# Altium PCB PCB1.PcbDoc
Units mm, origin at the board's own origin, x right, y up, seen from the top; angles counter-clockwise.
Board outline 152.4 x 101.6 mm, 2 copper layers (Top Layer, Bottom Layer); 71 components, 48 nets, 226 pads, 97 vias.
Unrouted connection lines stored in the file: 1.
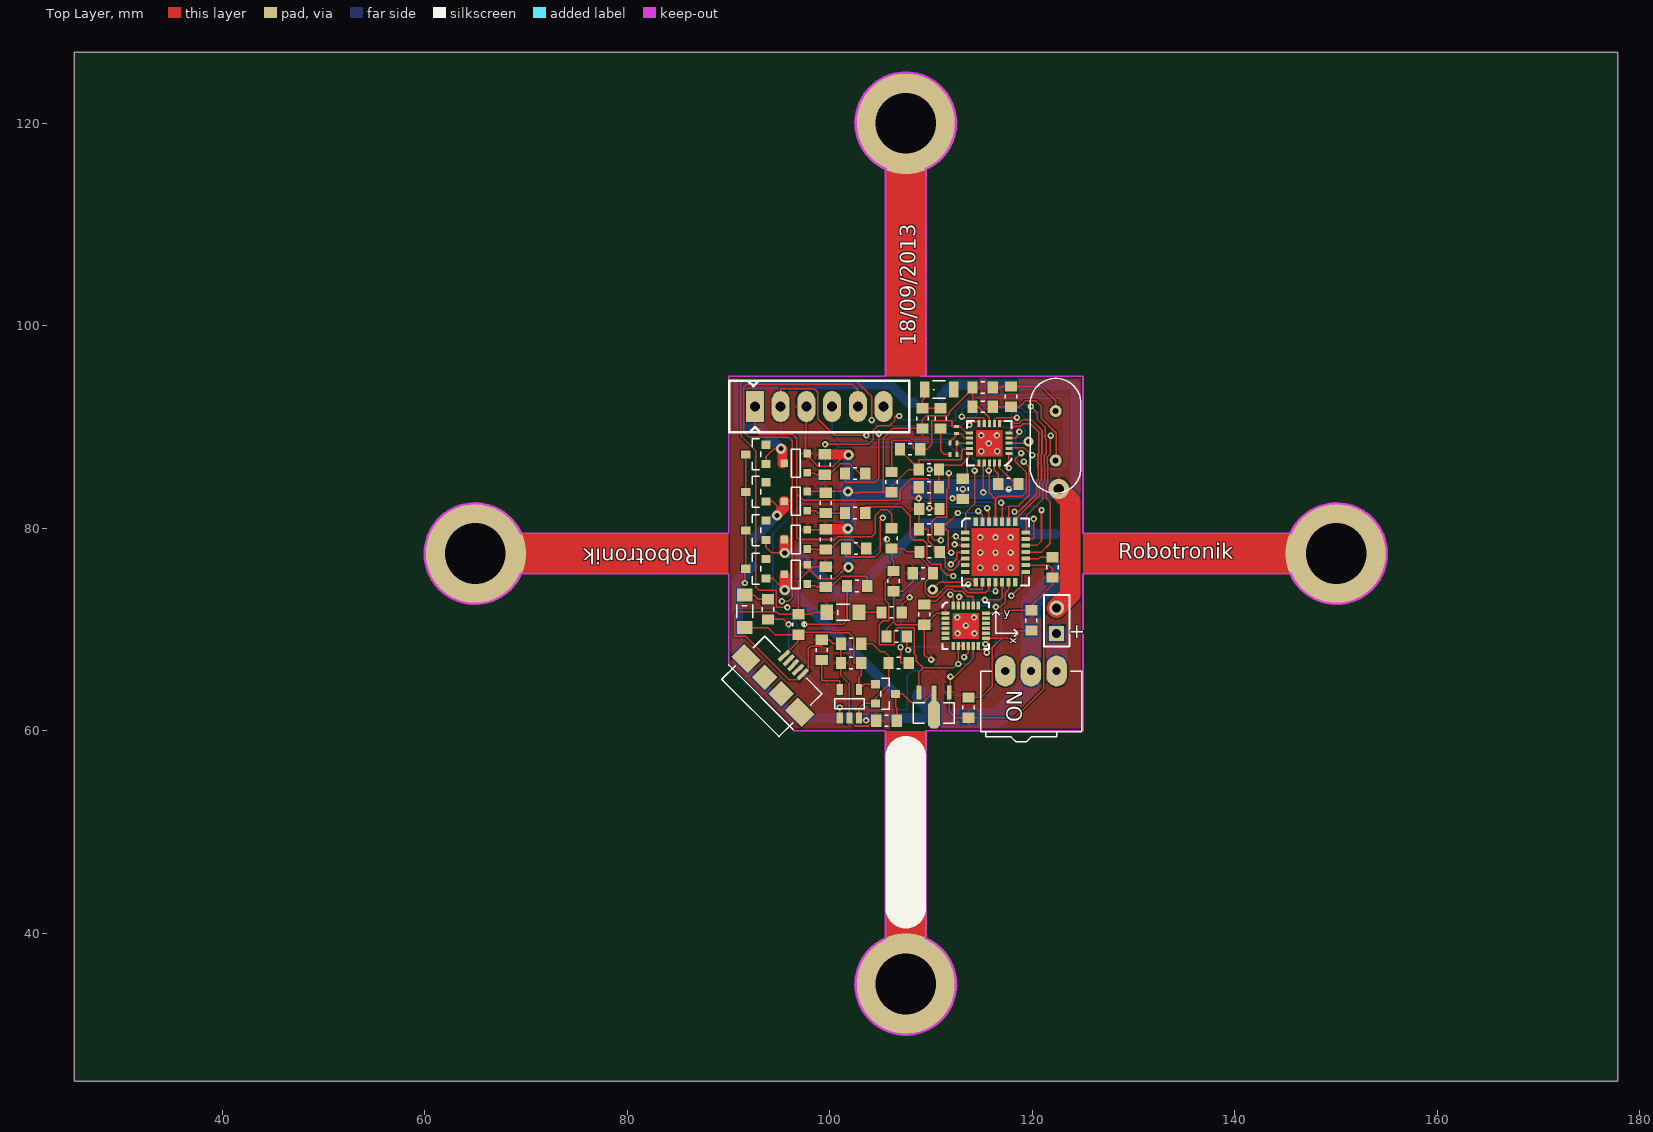
[diagram p0: Top Layer view]
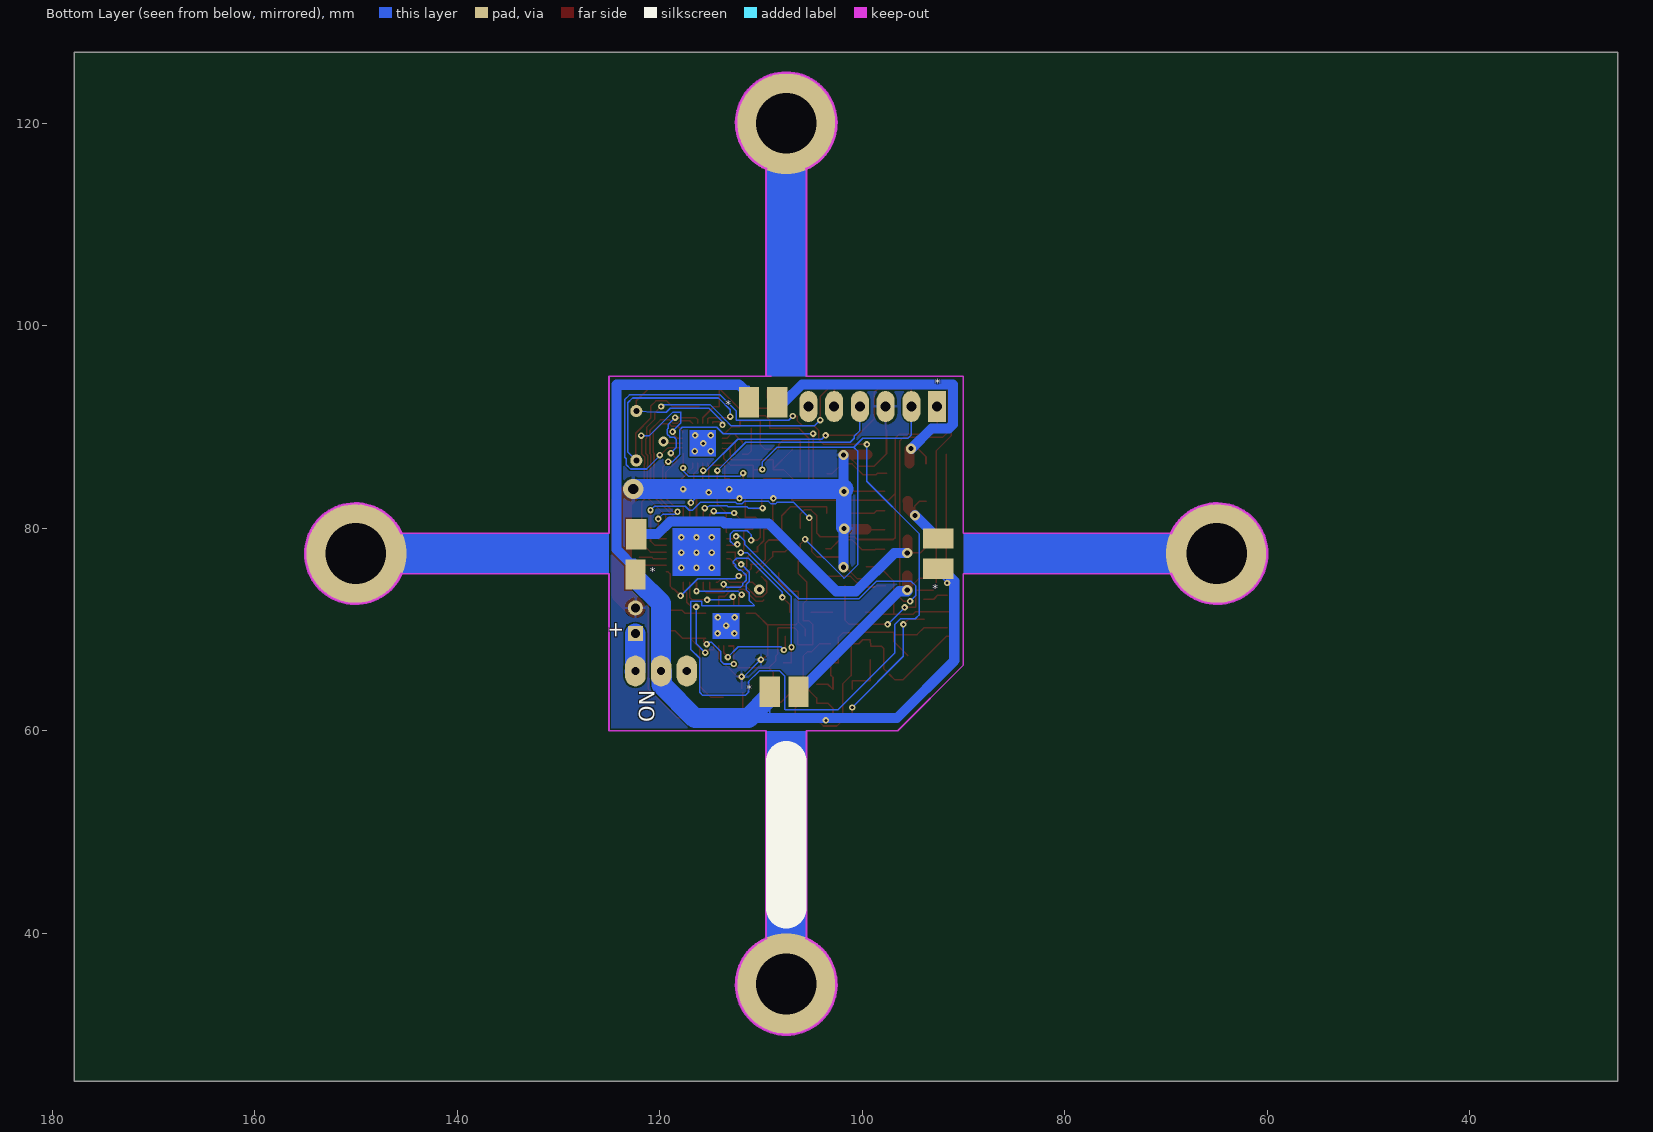
[diagram p1: Bottom Layer view, seen from below]

## Layer stack, top to bottom
Top Layer: signal copper 0.0356
Dielectric: dielectric 0.32, FR-4, Dk 4.8
Bottom Layer: signal copper 0.0356

## Board outline
25.4,25.4 177.8,25.4 177.8,127 25.4,127

## Design rules (kind name [scope] priority, off if disabled: settings)
Clearance [All] p1: gap=0.152
HoleSize [All] p1: absolutevalues=TRUE maxlimit=6.35 minlimit=0.305 maxpercent=80.000 minpercent=20.000
MinimumSolderMaskSliver [All] p1: minsoldermaskwidth=0.127
PolygonConnect [All] p1: connectstyle=Relief reliefconductorwidth=0.254 reliefentries=4 polygonreliefangle="90 Angle" airgapwidth=0.254
RoutingVias [All] p1: holewidth=0.305 width=0.635 viastyle="Through Hole" minholewidth=0.305 minwidth=0.635 maxholewidth=6.35 maxwidth=10
SilkscreenOverComponentPads [All] p1: minsilkscreentomaskgap=0.254
SolderMaskExpansion [All] p1: expansion=0.127
Width [All] p1: maxlimit=2.54 minlimit=0.152 preferedwidth=0.152
25 further rules are at their usual default settings.

## Classes and differential pairs
net class <Alim_mot>: NetD1_1 NetD2_1 NetD3_1 NetD4_1
component class Sheet1: ""
component class Sheet2: ""

## Components (designator, comment, footprint, x,y, rotation, side; value= is the part's Value field where it differs from the comment)
A1 "50 Ohm, 2.4GHz" Antene 110.8,93.7 r0 top
C1 "TANTALE 10uf" cms805 121.996,76.149 r90 top
C2 "0.1uf ceramique" cms805 106.299,74.778 r90 top
C2_1 "100nF" cms805 109.195,75.565 r0 top
C2_2 "10nF" cms805 119.9,70.9 r90 top
C2_3 "100nF" cms805 106.604,69.317 r180 top
C2_4 "2.2nF 50V" cms805 109.322,71.476 r90 top
C2_5 "2.2pF" cms805 107.925,87.808 r180 top
C2_6 "4.7pF" cms805 106.096,84.557 r270 top
C2_7 "33nF" cms805 117.627,84.379 r0 top
C2_8 "22pF" cms805 115.1,92 r0 top
C2_9 "22pF" cms805 115.1,93.9 r0 top
C2_10 "1.5pF" cms805 110.947,90.856 r270 top
C2_11 "1.0pF" cms805 109.144,90.856 r270 top
C2_12 "10nF" cms805 109.779,84.049 r180 top
C2_13 "1nF" cms805 109.779,85.801 r180 top
C3 "1uf" cms805 109.83,81.915 r0 top
C4 "4.7uF" cms805 96.9,70.5 r270 top
C5 "4.7uF" cms805 102.1,68.6 r0 top
C6 "0.1uf ceramique" cms805 109.855,77.673 r0 top
C7 "1uF" cms805 113.7,62.3 r90 top
D1 "BAT54" SOT23 91.7,87.3 r90 top
D2 "BAT54" SOT23 91.7,76 r90 top
D3 "BAT54" SOT23 91.7,79.8 r90 top
D4 "BAT54" SOT23 91.7,83.6 r90 top
D5 "LED" CMS1206 91.6,71.8 r90 top
D6 "LED" CMS1206 101.3,71.7 r180 top
IC1 "dsPIC33FJ128MC802" 28QFN-S 113.36,79.604 r0 top
IC2 "MPU6050" 24QFN 111.43,71.628 r0 top
IC3 "NRF24L01" 20QFN 117.7,87.4 r180 top
IC4 "MCP73831" SOT23-5 102,62.3 r0 top
IC5 "MCP1700" SOT89 111.8,63.8 r180 top
IRLML2246TRPbF "P-MOS1" SOT23 106.502,63.652 r270 top
L1 "2.7nH 402" CMS402 112.5,89.7 r90 top
L2 "3.9nH 402" CMS402 112.2,87.3 r180 top
L3 "8.2nH 402" CMS402 112.2,88.4 r0 top
LIPO "Header 2" HDR1X2 122.4,69.6 r90 top
N-MOS1 "FDN339" SuperSOT 97.775,86.425 r90 top
N-MOS2 "FDN339" SuperSOT 97.775,75.45 r90 top
N-MOS3 "FDN339" SuperSOT 97.775,78.9 r90 top
N-MOS4 "FDN339" SuperSOT 97.775,82.675 r90 top
P1 "pad_moteur" PAD 108.382,92.431 r180 bottom
P2 "pad_moteur" PAD 109.118,63.856 r180 bottom
P3 "pad_moteur" PAD 106.299,63.856 r0 bottom
P4 "pad_moteur" PAD 122.377,75.438 r0 bottom
P5 "pad_moteur" PAD 122.301,79.426 r180 bottom
P6 "pad_moteur" PAD 111.176,92.431 r180 bottom
P7 "pad_moteur" PAD 92.5,79 r270 bottom
P8 "pad_moteur" PAD 92.5,76 r270 bottom
pkb "pickit3" PICKIT3 92.608,92.024 r0 top
R1 "10k" cms805 99.5,86.3 r270 top
R2 "10k" cms805 99.6,75.2 r270 top
R2_1 "1M" cms805 117.9,93 r90 top
R2_2 "22k" cms805 113.132,83.896 r270 top
R3 "10k" cms805 99.6,78.9 r270 top
R4 "10k" cms805 99.6,82.5 r270 top
R5 "330" cms805 102.5,85.4 r0 top
R6 "330" cms805 102.7,74.3 r0 top
R7 "330" cms805 102.6,78 r0 top
R8 "330" cms805 102.5,81.5 r180 top
R10 "10k" cms805 106.096,78.994 r270 top
R11 "4.7k" cms805 99.2,68 r270 top
R12 "150" cms805 93.9,72 r90 top
R13 "1k" cms805 105.6,61 r0 top
R14 "10k" cms805 102.1,66.7 r0 top
R15 "17.25k" cms805 109.804,79.908 r0 top
R16 "4.7k" cms805 106.8,66.7 r180 top
R17 "65 + test" cms805 106.1,71.7 r0 top
SW1 "" inverseur 122.4,65.9 r180 top
USB1 "USB" USB_con 96.4,66.5 r315 top
X1 "16MHz" Quartz 122.301,86.69 r90 top

## Footprints (in the part's own frame and the unit in brackets; to place one, negate y for a bottom-side part, rotate by r counter-clockwise, add the part's x,y. Pads: shape width x height; smd on the part's side, far side on the other; paste and mask are expansions set on the pad)
20QFN [mm]
  rect 0.7x0.3 smd: 1(0,0) 2(0,-0.5) 3(0,-1) 4(0,-1.5) 5(0,-2) 11(3.9,-2) 12(3.9,-1.5) 13(3.9,-1) 14(3.9,-0.5) 15(3.9,0)
  rect 0.3x0.7 smd: 6(0.95,-2.95) 7(1.45,-2.95) 8(1.95,-2.95) 9(2.45,-2.95) 10(2.95,-2.95) 16(2.95,0.95) 17(2.45,0.95) 18(1.95,0.95) 19(1.45,0.95) 20(0.95,0.95)
  Top Layer region: 0.651,-2.295 3.251,-2.295 3.251,0.305 0.651,0.305
  Bottom Layer region: 0.651,-2.295 3.251,-2.295 3.251,0.305 0.651,0.305
  silkscreen extent -0.25,-3.2 4.15,1.2
24QFN [mm]
  rect 0.8x0.347 smd: 1(0,0) 2(0,-0.5) 3(0,-1) 4(0,-1.5) 5(0,-2) 6(0,-2.5) 13(4,-2.5) 14(4,-2) 15(4,-1.5) 16(4,-1) 17(4,-0.5) 18(4,0)
  rect 0.347x0.8 smd: 7(0.75,-3.25) 8(1.25,-3.25) 9(1.75,-3.25) 10(2.25,-3.25) 11(2.75,-3.25) 12(3.25,-3.25) 19(3.25,0.75) 20(2.75,0.75) 21(2.25,0.75) 22(1.75,0.75) 23(1.25,0.75) 24(0.75,0.75)
  Top Layer region: 0.678,-2.54 3.327,-2.54 3.327,0.025 0.678,0.025
  Bottom Layer region: 0.704,-2.54 3.353,-2.54 3.353,0.025 0.704,0.025
  silkscreen extent -0.3,-3.55 4.3,1.05
28QFN-S [mm]
  rect 0.85x0.4 smd: 1(0,0) 2(0,-0.65) 3(0,-1.3) 4(0,-1.95) 5(0,-2.6) 6(0,-3.25) 7(0,-3.9) 15(6,-3.9) 16(6,-3.25) 17(6,-2.6) 18(6,-1.95) 19(6,-1.3) 20(6,-0.65) 21(6,0)
  rect 0.4x0.85 smd: 8(1.05,-4.95) 9(1.7,-4.95) 10(2.35,-4.95) 11(3,-4.95) 12(3.65,-4.95) 13(4.3,-4.95) 14(4.95,-4.95) 22(4.95,1.05) 23(4.3,1.05) 24(3.65,1.05) 25(3,1.05) 26(2.35,1.05) 27(1.7,1.05) 28(1.05,1.05)
  Top Layer region: 0.653,-4.3 5.353,-4.3 5.353,0.4 0.653,0.4
  Bottom Layer region: 0.653,-4.3 5.353,-4.3 5.353,0.4 0.653,0.4
  silkscreen extent -0.33,-5.28 6.33,1.38
Antene [mm]
  rect 0.954x1.6 smd: 1(-1.427,0) 2(1.427,0)
  silkscreen extent -0.61,-0.84 0.61,0.86
CMS402 [mm]
  rect 0.3x0.5 smd: 1(-0.35,0) 2(0.35,0)
cms805 [mm]
  rect 1.016x1.2 smd: 1(-1,0) 2(1,0)
  silkscreen extent -0.18,-0.56 0.18,0.56
CMS1206 [mm]
  rect 1.27x1.5 smd: 1(-1.6,0) 2(1.6,0)
  silkscreen extent -0.63,-0.79 0.64,0.79
HDR1X2 [mm] "Connector; Header; 2 Position"
  rect 1.5x1.5 hole 0.9: 1(0,0)
  round 1.5 hole 0.9: 2(2.54,0)
  silkscreen extent -1.27,-1.27 3.81,1.27
inverseur [mil]
  oval 80x120 hole 31.5: 1(0,0) 2(100,0) 3(200,0)
  silkscreen extent -98,0 295,276
PAD [mm]
  rect 2x3 smd: 1(0,0)
PICKIT3 [mil]
  rect 70x120 hole 39.37: 1(0,0)
  oval 70x120 hole 39.37: 2(100,0) 3(200,0) 4(300,0) 5(400,0) 6(500,0)
  silkscreen extent -100,-100 600,100
Quartz [mm]
  round 1.2 hole 0.6: 1(0,0) 2(4.88,0)
  silkscreen extent -3.23,-2.5 8.11,2.5
SOT23 [mm]
  rect 0.8x0.9 smd: 1(-0.95,-2) 2(0,0) 3(0.95,-2)
  silkscreen extent -1.52,-1.47 1.52,-0.63
SOT23-5 [mm]
  rect 0.6x1.1 smd: 1(-1.016,-1.016) 2(-0.066,-1.016) 3(0.884,-1.016) 4(0.884,1.784) 5(-1.016,1.784)
  silkscreen extent -1.52,-0.13 1.4,0.89
SOT89 [mm]
  rect 0.48x1.4 smd: 1(0,0) 3(3,0)
  oct 1.2x2.7 smd: 2(1.5,2.2)
  rect 0.48x2 smd: 2(1.5,0.3)
  silkscreen extent -0.51,1.04 3.56,3.05
SuperSOT [mil]
  rect 30x30 smd: 1(-37.5,0) 2(0,90) 3(37.5,0)
  silkscreen extent -55,28 55,62
USB_con [mm]
  rect 2.3x1.8 smd: 0(-3.75,-2.85) 0(3.75,-2.85)
  rect 1.8x1.8 smd: 0(-1.15,-2.85) 0(1.15,-2.85)
  rect 0.4x1.4 smd: 1(-1.3,0) 2(-0.65,0) 3(0,0) 4(0.65,0) 5(1.3,0)
  silkscreen extent -4.5,-6 4.5,0

## Part data
A1: library part Antenne
C1 C2 C2_1 C2_2 C2_3 C2_4 C2_5 C2_6 C2_7 C2_8 C2_9 C2_10 C2_11 C2_12 C2_13 C3 C4 C5 C6 C7: library part Capa
D1 D2 D3 D4: library part "Schottky BAT54"
IC4: library part "MCP73831 Li-Po"
IRLML2246TRPbF: library part P-MOS
L1 L2 L3: library part Inductance
LIPO: "Header, 2-Pin"
N-MOS1 N-MOS2 N-MOS3 N-MOS4: library part "N-MOS FDN339"
R1 R2 R2_1 R2_2 R3 R4 R5 R6 R7 R8 R10 R11 R12 R13 R14 R15 R16 R17: library part Resistance
SW1: library part switch
X1: library part Quartz

## Via types
v1: diameter 0.635, hole 0.305, Top Layer to Bottom Layer, tented both sides, 82 vias
v2: diameter 1, hole 0.5, Top Layer to Bottom Layer, tented both sides, 8 vias
v3: diameter 10, hole 6, Top Layer to Bottom Layer, tented both sides, 4 vias
v4: diameter 1, hole 0.5, Top Layer to Bottom Layer, 2 vias
v5: diameter 2, hole 1, Top Layer to Bottom Layer, tented both sides, 1 vias

## Nets (pads, with @x,y where several pads share a name; then routed paths per layer and width w, separated by ;. In a path a pad name is that pad's centre, name@x,y a point inside that pad or via, vN(x,y) a via of type N, cw(c..) or ccw(c..) an arc to the next point about the centre after c; other vN are vias at no path point)
GND: C1.1 C2.1 C2_1.1 C2_2.2 C2_3.2 C2_4.1 C2_5.2 C2_6.2 C2_7.2 C2_8.1 C2_9.1 C2_11.2 C2_12.2 C2_13.2 C3.1 C4.1 C5.1 C6.2 C7.1 D6.2 IC1.5 IC1.16 IC1.24 IC2.1 IC2.11 IC2.18 IC3.8 IC3.14 IC3.17 IC3.20 IC4.2 IC5.1 LIPO.2 N-MOS1.3 N-MOS2.3 N-MOS3.3 N-MOS4.3 pkb.3 R1.1 R2.1 R2_2.2 R3.1 R4.1 R11.1 R13.1 R14.1 R15.1 USB1.5 | length 245.5
  Top Layer w0.152: USB1.5 96.762,65.024 95.987,65.024 91.694,69.317 90.627,69.317 90.602,69.342 90.602,71.438 90.919,71.755 94.742,71.755 94.997,71.5 C4.1 ; USB1.5@97.561,65.837 97.892,66.167 97.892,68.148 98.095,68.351 99.175,68.351 R11.1 99.949,69 100.349,68.6 C5.1 R14.1 101.1,65.451 101.934,64.617 IC4.2 101.934,61.036 102.495,60.475 103.822,60.475 104.347,61 R13.1 ; pkb.3 97.688,89.801 97.6,89.713 97.6,87.353 98.849,86.103 100.321,86.103 101.467,87.249 v2(101.829,87.249) ; N-MOS2.3@97.7,76.253 98.025,75.927 ; N-MOS3.3@97.8,79.853 101.671,79.853 v2(101.778,79.959) ; N-MOS4.3@97.8,83.653 v2@101.793,83.653 ; R2.1 98.298,76.2 98.025,75.927 ; D6.2 98.396,71.7 98.196,71.5 C4.1 ; v2(101.829,76.149) 101.62,76.149 100.472,75.001 98.951,75.001 98.025,75.927 ; v2@101.89,83.5 102.819,83.5 102.876,83.557 105.302,83.557 ; C2_3.2 105.604,70.049 106.299,70.744 ; C2_5.2 106.925,87.732 C2_13.2@108.779,85.877 ; C2_1.1@108.229,75.616 108.229,74.778 107.229,73.778 C2.1 106.299,70.744 ; C2_12.2 v1(108.779,82.956) 108.779,82.804 108.83,82.753 C3.1 108.83,80.899 108.804,80.874 R15.1 109.703,79.908 109.728,78.765 110.338,78.156 110.338,77.673 C6.2@110.846,77.673 ; v1(110.007,67.031) 109.322,67.462 C2_4.1 C2_4.1@109.322,70.485 ; 110.185,71.263 110.55,71.628 IC2.1 ; 110.236,71.349 109.372,70.485 C2_4.1@109.322,70.485 ; C6.2@111.023,77.495 111.417,77.102 111.417,76.202 111.737,75.882 112.189,75.882 112.707,76.4 112.707,76.648 113.062,77.004 IC1.5 ; IC5.1 111.8,61.895 112.395,61.3 C7.1 118.298,61.3 121.107,64.11 121.107,73.546 ; IC5.1@111.912,64.135 v1(111.912,65.354) ; v1(112.116,82.956) 112.176,82.896 R2_2.2 v1(113.132,83.871) ; v1@112.128,65.138 114.18,67.19 IC2.11 ; IC3.14 113.053,87.796 112.977,86.766 108.779,86.741 C2_13.2@108.779,85.877 ; C2_9.1@114.1,93.78 111.776,91.456 111.776,91.253 111.632,91.11 109.537,91.11 109.144,90.716 C2_11.2 106.223,89.856 105.267,88.9 105.267,83.591 105.302,83.557 ; C2_9.1 C2_8.1 114.667,92 115.75,90.917 IC3.8 ; v1(115.151,83.541) 115.151,86.153 115.25,86.252 IC3.17 ; IC2.18 117.526,71.628 117.798,71.9 C2_2.2 119.9,72.339 121.107,73.546 ; IC3.20 116.75,85.954 118.008,84.695 118.627,84.695 C2_7.2 118.627,84.277 118.085,84.277 v1(117.678,83.871) ; v1(116.916,82.525) 117.01,82.431 IC1.24 ; IC1.16 121.602,76.354 121.996,75.96 C1.1 ; 121.996,74.435 121.996,74.447 ; 123.495,75.133 123.479,75.149 C1.1 ; C4.1 96.9,74.802 98.025,75.927 ; 105.302,83.557 C2_6.2 106.096,84.125 107.772,85.801 C2_13.2 C2_13.2@108.779,85.877 ; 106.299,70.744 106.558,70.485 C2_4.1@109.322,70.485 ; 121.107,73.546 121.107,73.558 121.996,74.447 ; 121.996,74.447 C1.1
  Top Layer w1: R1.1 v2@101.88,87.3 ; R3.1 101.49,79.9 v2@101.575,79.985
  Top Layer w2: LIPO.2 123.749,73.489 123.749,76.164 ; v5@122.58,83.845 123.749,82.677 123.749,76.164
  Bottom Layer w0.152: v1(108.779,82.956) v1(112.116,82.956) ; v1(110.007,67.031) v1@111.722,65.316 ; 115.57,83.871 v1(116.916,82.525)
  Bottom Layer w1: v2@101.829,76.2 v2@101.829,80.086 ; v2@101.829,83.871 v2@101.829,87.224
  Bottom Layer w1.5: v2@101.829,80.086 v2@101.829,83.871
  Bottom Layer w2: v2@101.838,83.88 122.596,83.88 v5(122.606,83.871)
  other v2: 101.803,83.642
IMU_INT: IC1.13 IC2.12 | length 9.4
  Top Layer w0.152: IC2.12 114.68,68.008 115.202,68.008 v1(115.494,67.716) ; v1(116.395,72.238) 116.845,72.238 117.315,72.707 117.315,73.604 117.66,73.95 IC1.13
  Bottom Layer w0.152: v1(115.494,67.716) 116.395,68.618 v1(116.395,72.238)
IMU_SCL: IC1.12 IC2.23 | length 6.9
  Top Layer w0.152: IC2.23 112.68,73.081 112.801,73.203 v1(112.776,73.228) ; v1(115.316,72.923) 116.782,72.923 117.01,73.152 IC1.12
  Bottom Layer w0.152: v1(112.776,73.228) 113.081,72.923 v1(115.316,72.923)
IMU_SDA: IC1.11 IC2.24 | length 6.6
  Top Layer w0.152: v1(111.901,73.443) 112.18,73.164 IC2.24 ; v1(116.36,73.794) IC1.11
  Bottom Layer w0.152: v1(111.901,73.443) 112.253,73.794 v1(116.36,73.794)
NetA1_1: A1.1 C2_10.1 C2_11.1 | length 3.7
  Top Layer w0.152: A1.1 109.373,92.888 109.144,92.659 C2_11.1 C2_10.1
NetC1_2: C1.2 IC1.17 | length 2.7
  Top Layer w0.152: IC1.17 120.647,77.004 120.792,77.149 C1.2
NetC2_3_1: C2_3.1 IC2.10 | length 8.7
  Top Layer w0.152: C2_3.1 107.604,68.113 v1(107.734,67.983) ; v1(113.259,67.285) 113.68,67.706 IC2.10
  Bottom Layer w0.152: v1(107.734,67.983) 108.052,68.301 112.243,68.301 v1(113.259,67.285)
NetC2_4_2: C2_4.2 IC2.20 | length 6.2
  Top Layer w0.152: C2_4.2@109.728,72.873 109.728,72.919 109.851,72.796 110.483,72.796 111.675,73.989 112.127,73.989 112.342,73.774 113.069,73.774 113.58,73.263 114.148,73.263 114.18,73.231 IC2.20
NetC2_5_1: C2_5.1 C2_6.1 IC3.11 L1.2 | length 14.7
  Top Layer w0.152: C2_6.1 106.096,88.646 107.836,88.671 108.255,88.252 108.255,87.833 C2_5.1 109.601,87.808 110.058,88.265 110.058,90.576 110.084,90.602 112.014,90.602 112.065,90.551 112.065,90.075 112.09,90.05 L1.2 112.866,90.05 113.516,89.4 IC3.11
NetC2_7_1: C2_7.1 IC3.19 | length 2.2
  Top Layer w0.152: IC3.19 116.25,85.761 116.627,85.384 C2_7.1
NetC2_8_2: C2_8.2 IC3.9 R2_1.1 X1.1 | length 31.5
  Top Layer w0.152: v1@113.03,90.929 115.138,90.929 115.25,90.817 IC3.9 ; C2_8.2 R2_1.1 118.734,92 119.304,92.57 120.371,92.57 120.879,92.062 120.879,90.881 122.364,89.395 122.364,86.754 X1.1
  Bottom Layer w0.152: v1@113.03,91.008 v1(113.03,91.034) 113.03,91.694 114.198,92.862 122.669,92.862 123.139,92.392 123.139,87.528 X1.1
NetC2_9_2: C2_9.2 IC3.10 R2_1.2 X1.2 | length 18.7
  Top Layer w0.152: v1(113.792,90.208) 114.109,90.526 114.75,90.526 IC3.10 ; C2_9.2 116.942,93.9 117.042,94 R2_1.2 120.887,94 122.301,92.586 X1.2
  Bottom Layer w0.152: v1(113.792,90.208) 113.792,90.526 115.126,91.859 118.953,91.859 119.352,91.46 120.303,91.46 X1.2
NetC2_10_2: C2_10.2 L2.2 | length 3.3
  Top Layer w0.152: C2_10.2 110.947,87.63 111.277,87.3 L2.2
NetC3_2: C3.2 IC1.26 pkb.1 R10.1 | length 56.1
  Top Layer w0.152: pkb.1 92.608,89.725 93.027,89.306 96.342,89.306 96.749,88.9 96.749,83.439 ; R10.1 106.096,81.445 105.727,81.813 105.054,81.813 104.496,81.255 104.496,79.527 104.14,79.171 100.761,79.171 100.482,78.892 96.926,78.892 96.749,79.07 96.749,83.439 ; v1(109.83,81.991) 110.185,81.915 110.223,81.915 ; C3.2 110.223,81.915 ; v1(115.545,81.991) 115.71,81.546 IC1.26 ; 96.749,83.439 97.434,82.753 106.909,82.753 106.934,82.779 106.934,83.795 108.026,84.887 109.677,84.887 109.906,84.658 109.906,82.233 110.223,81.915
  Bottom Layer w0.152: v1(109.83,81.991) 111.258,81.991 111.385,82.118 111.75,82.118 111.763,82.105 112.468,82.105 112.481,82.118 113.221,82.118 113.348,82.245 115.087,82.245 115.214,82.118 115.443,82.118 115.545,82.017 v1(115.545,81.991)
NetD1_1: D1.1 N-MOS1.2 P1.1 | length 31.2
  Top Layer w0.152: D1.1 93.7,87.071 94.487,87.859 v2(95.199,87.859)
  Top Layer w1: v2@95.212,87.845 95.314,87.845 N-MOS1.2@95.314,86.4
  Bottom Layer w1: v2@95.148,87.859 93.159,89.848 91.449,89.848 91.028,90.269 91.028,94.201 105.947,94.201 107.717,92.431 P1.1
NetD2_1: D2.1 N-MOS2.2 P3.1 | length 18.8
  Top Layer w0.152: D2.1 94.393,75.05 v2(95.555,73.889) ; N-MOS2.2@95.414,75.3 95.555,75.3 N-MOS2.2@95.555,75.311
  Top Layer w1: v2(95.555,73.889) 95.555,75.3 N-MOS2.2@95.555,75.311
  Bottom Layer w1: v2@95.529,73.787 95.555,73.787 96.368,73.787 P3.1
NetD3_1: D3.1 N-MOS3.2 P5.1 | length 35.7
  Top Layer w0.152: D3.1 93.7,78.13 94.259,77.572 v2(95.555,77.572)
  Top Layer w1: N-MOS3.2@95.514,78.9 95.514,77.638 v2@95.529,77.622
  Bottom Layer w1: v2@95.606,77.546 96.85,77.546 100.609,73.787 102.565,73.787 109.262,80.483 113.015,80.483 113.025,80.493 113.58,80.493 113.743,80.656 118.983,80.656 120.213,79.426 P5.1
NetD4_1: D4.1 N-MOS4.2 P7.1 | length 7.2
  Top Layer w0.152: D4.1 94.375,82.65 94.793,82.233 v2(94.793,81.28)
  Top Layer w1: v2@94.802,81.305 94.818,81.305 95.479,81.966 95.479,82.7 95.479,82.702 N-MOS4.2@95.514,82.7
  Bottom Layer w1: P7.1 v2@94.786,81.286
NetD5_2: D5.2 R12.2 | length 2.5
  Top Layer w0.152: D5.2 92.532,73.4 92.932,73 R12.2
NetD6_1: D6.1 R17.1 | length 2.2
  Top Layer w0.152: D6.1 103.988,71.7 R17.1
NetIC1_2: IC1.27 R15.2 R16.1 | length 23.2
  Top Layer w0.152: v1(106.985,68.25) 106.985,66.725 107.01,66.7 R16.1 ; v1(111.989,77.597) 111.684,77.901 111.684,79.73 111.506,79.908 R15.2 110.804,80.416 111.557,80.416 v1(112.649,81.509) v1@112.674,81.534 ; v1@114.857,81.534 115.06,81.331 IC1.27
  Bottom Layer w0.152: v1(106.985,68.25) 106.985,73.228 111.354,77.597 v1(111.989,77.597) ; v1(112.649,81.509) 114.478,81.509 v1(114.656,81.686)
NetIC1_4: IC1.1 pkb.4 | length 24.7
  Top Layer w0.152: IC1.1 113.411,79.604 113.411,81.509 114.3,82.398 v1(114.3,85.7)
  Bottom Layer w0.152: pkb.4 100.228,89.649 100.774,89.103 100.774,88.9 101.181,88.494 111.506,88.494 v1(114.3,85.7)
NetIC1_5: IC1.2 pkb.5 | length 63.7
  Top Layer w0.152: v1(95.275,72.796) 95.91,72.796 96.291,73.177 96.291,88.621 95.91,89.002 92.024,89.002 91.491,89.535 91.491,93.929 91.77,94.209 102.235,94.209 102.768,93.675 pkb.5 ; v1(112.446,79.197) 112.461,79.197 112.472,79.209 112.728,78.954 IC1.2
  Bottom Layer w0.152: v1(95.275,72.796) 94.691,73.381 94.691,74.295 95.174,74.778 98.588,74.778 100.316,73.05 106.257,73.05 111.594,78.387 111.594,78.74 112.062,79.209 112.472,79.209 112.461,79.197 v1(112.446,79.197)
NetIC1_12: IC1.9 R17.2 | length 16.4
  Top Layer w0.152: R17.2 107.137,71.7 107.137,72.441 v1(107.874,73.177) ; v1(113.69,74.473) 113.69,74.143 113.843,73.99 115.035,73.99 115.06,74.016 IC1.9
  Bottom Layer w0.152: v1(107.874,73.177) 107.874,73.686 111.226,77.038 112.395,77.038 112.725,76.708 112.725,76.556 112.649,76.556 112.509,76.416 112.509,76.202 112.189,75.882 111.976,75.882 111.455,75.362 111.455,74.863 111.773,74.546 111.773,74.409 111.989,74.193 113.411,74.193 v1(113.69,74.473)
NetIC1_18: IC1.15 R8.1 | length 24.4
  Top Layer w0.152: R8.1 103.5,82.105 103.513,82.118 107.074,82.118 107.95,81.242 107.95,79.159 108.267,78.842 109.22,78.842 109.592,78.47 109.592,76.899 110.037,76.454 110.998,76.454 110.973,76.429 110.973,75.997 111.608,75.362 v1@112.319,75.362 ; v1(112.192,75.286) 112.268,75.286 v1@112.243,75.26 ; v1(117.926,73.336) 118.567,73.977 118.654,73.977 118.972,74.295 118.972,75.498 119.177,75.704 IC1.15
  Bottom Layer w0.152: v1@112.243,75.311 112.535,75.019 116.243,75.019 v1(117.926,73.336)
NetIC1_22: IC1.19 R7.1 | length 29.9
  Top Layer w0.152: R7.1 101.6,77.191 101.625,77.165 104.457,77.165 105.004,77.711 105.004,80.797 v1(105.232,81.026) ; IC1.19 120.468,78.304 120.904,78.74 v1(120.904,81.788)
  Bottom Layer w0.152: v1(105.232,81.026) 106.756,82.55 108.413,82.55 108.553,82.41 109.005,82.41 109.246,82.652 111.648,82.652 111.889,82.41 112.342,82.41 112.481,82.55 116.002,82.55 116.764,81.788 117.069,81.788 117.462,82.182 120.51,82.182 v1(120.904,81.788)
NetIC1_24: IC1.21 R6.1 | length 82.7
  Top Layer w0.152: v1(95.809,72.187) 94.755,72.187 94.729,72.212 94.729,73.838 94.704,73.863 93.015,73.863 92.71,74.168 92.71,87.643 91.186,89.167 91.186,94.488 91.211,94.513 102.641,94.513 104.14,93.015 v1(104.14,90.678) ; v1(97.485,70.51) 101.282,70.51 101.7,70.928 R6.1 ; IC1.21 119.38,79.604 119.38,81.216 121.05,82.887 121.047,82.89 121.047,84.481 121.209,84.642 121.209,86.18 121.168,86.221 121.168,87.16 121.361,87.353 121.361,88.839 121.26,88.941 121.26,89.992 120.471,90.781 120.471,91.416 v1(119.863,92.024)
  Bottom Layer w0.152: v1(95.809,72.187) v1(97.485,70.51) ; v1(104.14,90.678) 104.699,90.119 112.954,90.119 113.246,90.411 113.246,90.434 113.566,90.754 113.59,90.754 113.805,90.969 113.805,90.993 114.988,92.177 119.71,92.177 v1(119.863,92.024)
NetIC1_26: IC1.23 R5.1 | length 33.6
  Top Layer w0.152: R5.1 101.525,84.557 104.457,84.557 104.851,84.95 v1(104.851,89.344) ; IC1.23 117.66,82.169 118.603,82.205 119.685,83.287 119.685,86.047 v1(119.149,86.583)
  Bottom Layer w0.152: v1(104.851,89.344) 113.728,89.344 114.351,89.967 117.78,89.967 118.034,89.713 118.034,87.264 118.715,86.583 v1(119.149,86.583)
NetIC3_12: IC3.12 L1.1 L3.1 | length 2.7
  Top Layer w0.152: L3.1 111.85,88.544 112.5,89.194 L1.1 112.903,89.35 113.353,88.9 IC3.12
NetIC3_13: IC3.13 L2.1 L3.2 | length 2.4
  Top Layer w0.152: L2.1 L3.2 113.157,88.4 IC3.13
NetIC3_16: IC3.16 R2_2.1 | length 3.2
  Top Layer w0.152: R2_2.1 113.584,84.896 113.584,86.216 113.614,86.246 114.75,86.246 IC3.16
NetIC4_1: IC4.1 R12.1 | length 13.6
  Top Layer w0.152: R12.1 95.446,71 v1(95.936,70.51) ; IC4.1 v1(100.984,62.306)
  Bottom Layer w0.152: v1(95.936,70.51) 95.936,67.354 v1(100.984,62.306)
NetIC4_5: IC4.5 R11.2 | length 4.7
  Top Layer w0.152: R11.2 99.2,64.973 99.225,64.948 100.959,64.948 100.984,64.922 IC4.5
NetIC5_2: IC5.2 IRLML2246TRPbF.2 R13.2 | length 9
  Top Layer w0.152: R13.2 106.6,62.255 106.502,62.353 IRLML2246TRPbF.2 107.188,63.652 108.011,62.83 109.235,62.83 109.906,63.5 110.3,63.5 IC5.2@110.3,61.6
NetLIPO_1: LIPO.1 SW1.1 | length 3.9
  Bottom Layer w2: LIPO.1 SW1.1@122.4,65.916 ; SW1.1@122.4,65.916 SW1.1@122.408,65.908 ; SW1.1@122.4,65.916 SW1.1@122.408,65.908 ; SW1.1@122.408,65.908 SW1.1@122.453,65.862 ; SW1.1@122.408,65.908 SW1.1@122.453,65.862 ; SW1.1@122.408,65.908 SW1.1@122.453,65.862
PWM1: N-MOS1.1 R1.2 R5.2 | length 6.8
  Top Layer w0.152: N-MOS1.1@97.6,85.448 98.476,85.448 98.623,85.3 R1.2 99.949,85.3 101.009,86.36 102.006,86.36 102.966,85.4 R5.2
PWM2: N-MOS2.1 R2.2 R6.2 | length 7.4
  Top Layer w0.152: N-MOS2.1@97.7,74.348 98.552,74.348 98.7,74.2 R2.2 100.101,74.2 101.147,75.246 103.664,75.246 103.7,75.209 R6.2
PWM3: N-MOS3.1 R3.2 R7.2 | length 6.6
  Top Layer w0.152: N-MOS3.1@97.8,77.948 98.654,77.948 98.701,77.9 R3.2 100.051,77.9 101.017,78.867 102.21,78.867 103.077,78 R7.2
PWM4: N-MOS4.1 R4.2 R8.2 | length 3.8
  Top Layer w0.152: N-MOS4.1@97.8,81.748 98.552,81.748 98.799,81.5 R4.2 100.533,81.5 R8.2
RF_CE: IC1.3 IC3.1 | length 22.3
  Top Layer w0.152: v1(110.973,78.816) 110.338,78.816 110.058,79.096 110.058,80.645 110.49,81.077 111.544,81.077 111.569,81.102 111.569,83.845 111.76,84.036 v1(111.76,85.446) ; v1(112.319,78.41) 112.319,78.329 112.344,78.304 IC1.3 ; v1(117.678,85.954) 117.678,87.4 IC3.1
  Bottom Layer w0.152: v1(110.973,78.816) 110.973,79.375 111.352,79.755 112.714,79.755 113.03,79.438 113.03,78.727 112.712,78.41 v1(112.319,78.41) ; v1(111.76,85.446) 112.065,85.141 117.157,85.141 117.678,85.661 v1(117.678,85.954)
RF_CSN: IC1.4 IC3.2 | length 115.6
  Top Layer w0.152: v1(99.543,88.29) 103.822,88.29 104.292,88.76 104.292,89.662 104.775,90.145 105.918,90.145 106.426,90.653 106.426,91.059 106.451,91.084 v1(106.858,91.084) ; v1@111.938,76.403 112.535,77 112.535,77.622 112.566,77.654 IC1.4 ; IC3.2 117.773,87.973 119.124,87.973 119.196,87.9 119.218,87.9 119.234,87.916 119.926,87.224 v1(119.99,87.224)
  Bottom Layer w0.152: v1(99.543,88.29) 99.543,84.633 94.386,79.477 94.386,71.438 94.755,71.069 96.215,71.069 96.799,70.485 96.799,67.666 102.362,62.103 107.62,62.103 107.645,62.128 107.645,65.405 108.153,65.913 110.172,65.913 111.227,64.859 111.227,63.817 111.544,63.5 115.735,63.5 116.053,63.817 116.053,67.17 116.942,68.059 116.942,72.771 116.916,72.796 115.875,72.796 115.849,72.771 115.849,72.39 115.824,72.365 110.642,72.365 111.15,72.873 111.15,73.65 111.468,73.967 111.468,74.42 111.15,74.737 111.15,75.667 v1@111.849,76.365 ; v1(106.858,91.084) 107.264,90.678 112.446,90.678 112.446,91.592 114.021,93.167 122.987,93.167 123.444,92.71 123.444,87.02 123.292,86.868 123.292,86.271 122.872,85.852 121.298,85.852 119.926,87.224 v1(119.99,87.224)
  other v1: 111.963,76.429
RF_IRQ: IC1.22 IC3.6 | length 15.3
  Top Layer w0.152: IC3.6 117.027,90.627 117.998,90.627 118.239,90.386 118.692,90.386 119.009,90.703 119.926,90.703 120.955,89.675 120.955,87.378 120.863,87.286 120.863,86.094 120.904,86.053 120.904,84.769 120.742,84.607 120.742,83.277 118.545,81.08 118.31,81.08 IC1.22
RF_MISO: IC1.20 IC3.5 | length 17.8
  Top Layer w0.152: IC3.5 117.7,89.557 118.224,90.081 118.818,90.081 119.059,90.322 119.812,90.322 120.65,89.484 120.65,87.504 120.558,87.412 120.558,85.968 120.599,85.927 120.599,84.895 120.437,84.733 120.437,83.404 118.669,81.636 v1(118.237,81.636) ; IC1.20 120.117,78.954 120.142,78.979 v1(120.142,80.924)
  Bottom Layer w0.152: v1(118.237,81.636) 118.466,81.407 119.659,81.407 v1(120.142,80.924)
RF_MOSI: IC1.18 IC3.4 | length 22.7
  Top Layer w0.152: IC3.4 118.262,88.9 118.834,89.471 v1@118.72,89.586 ; v1(118.72,89.535) v1@118.72,89.687 ; IC1.18 120.91,77.654 121.768,78.511 121.768,82.601 121.352,83.017 121.352,84.354 121.514,84.516 121.514,86.306 121.472,86.347 121.472,87.033 121.768,87.329 v1@121.768,89.078
  Bottom Layer w0.152: v1(118.72,89.535) v1@118.72,89.687 ; v1@118.72,89.586 117.907,90.399 117.907,91.453 117.932,91.478 118.694,91.478 121.056,89.115 121.78,89.115 v1(121.818,89.154)
RF_SCK: IC1.8 IC3.3 | length 6.5
  Top Layer w0.152: v4@110.236,74.092 110.798,74.654 113.099,74.654 113.464,75.019 113.917,75.019 114.282,74.654 IC1.8 ; IC3.3 119.185,88.4 v4@119.38,88.595
  other v4: 110.16,73.965 119.609,88.57
USB: C4.2 D5.1 IC4.4 IRLML2246TRPbF.1 R14.2 USB1.1 | length 22
  Top Layer w0.152: D5.1 93.878,70.2 94.578,69.5 C4.2 ; USB1.1 96.9,68.838 C4.2 ; IRLML2246TRPbF.1 103.402,64.602 IC4.4 102.884,65.278 103.1,65.494 R14.2 102.387,66.7 102.362,66.725 102.362,69.228 101.917,69.672 100.101,69.672 100.025,69.748 96.9,69.748 C4.2
VBAT: C5.2 D1.2 D2.2 D3.2 D4.2 IC4.3 IRLML2246TRPbF.3 P2.1 P4.1 P6.1 P8.1 R16.2 SW1.2 | length 157.5
  Top Layer w0.152: v1(91.618,74.6) 91.618,76 D2.2 D3.2 D4.2 D1.2 ; C5.2 104.222,68.6 105.007,67.815 105.413,67.815 105.8,67.428 R16.2 105.8,64.544 104.502,63.246 IRLML2246TRPbF.3 103.356,62.702 102.884,62.23 IC4.3 103.132,61.036 v1(103.581,61.036)
  Bottom Layer w0.152: v1(91.618,74.6) 91.999,74.981 P8.1@91.999,76 ; P8.1@92.38,76.276 91.999,76.276 P8.1@91.999,76 ; P8.1 P8.1@91.999,76 ; v1(103.581,61.036) 108.585,61.036 109.118,61.57 109.118,63.398 P2.1 ; P6.1@111.049,93.066 P6.1@111.176,93.193 ; P6.1 P6.1@111.176,93.193 ; P4.1 122.377,76.029 122.377,76.949 123.787,76.949 124.282,77.445 124.282,77.921 ; 124.282,93.701 123.927,94.056 ; P6.1@111.176,93.193 112.016,94.032 ; P6.1@111.176,93.193 111.176,94.031 112.016,94.032 ; 112.016,94.032 112.141,94.158 123.825,94.158 123.927,94.056 ; 112.016,94.032 123.927,94.056
  Bottom Layer w1: P8.1@92.38,76.276 90.907,74.803 90.907,66.929 96.571,61.265 111.252,61.265 ; P6.1@111.049,93.066 112.153,94.17 124.271,94.17 124.271,77.921 ; P4.1@122.377,76.029 124.271,77.922
  Bottom Layer w2: P2.1@109.118,63.398 111.252,61.265 116.515,61.265 119.8,64.55 119.8,65.84 SW1.2 119.86,72.591 P4.1@122.25,74.981
VCC: C2.2 C2_1.2 C2_2.1 C2_12.1 C2_13.1 C6.1 C7.2 IC1.10 IC1.25 IC2.8 IC2.9 IC2.13 IC3.7 IC3.15 IC3.18 IC5.3 pkb.2 R10.2 | length 156.6
  Top Layer w0.152: pkb.2 95.148,93.751 95.174,93.777 98.45,93.777 98.806,93.421 98.806,90.805 100.432,89.179 v1(103.607,89.179) ; v1(105.639,78.918) 106.096,78.461 R10.2 ; IC5.3 108.8,65.798 109.22,66.218 ; v1(109.855,85.801) C2_13.1 ; C2_1.2@109.957,75.235 109.431,74.709 109.431,73.663 109.858,73.236 110.462,73.236 111.519,74.294 112.981,74.294 113.64,73.635 115.367,73.635 115.71,73.977 IC1.10 ; C2_1.2@110.444,75.616 108.855,77.205 C6.1 107.61,77.673 107.29,77.994 R10.2 ; C2_12.1 C2_13.1 ; v1(112.68,66.599) v1@112.68,66.675 ; IC2.9 IC2.8 v1@112.68,66.675 ; C7.2 114.935,63.3 116.04,64.405 116.04,68.211 116.957,69.128 ; IC3.15 113.665,87.4 113.665,86.893 113.005,86.233 110.779,86.233 C2_13.1 ; v1(115.367,68.555) 115.646,68.834 IC2.13@115.646,69.128 ; IC2.13 IC2.13@115.646,69.128 ; v1(115.697,85.7) v1@115.75,85.753 ; IC3.18 v1@115.75,85.753 ; IC3.7 116.25,90.729 116.453,90.932 v1(118.466,90.932) ; IC1.25 116.36,82.867 ; v1(118.897,87.427) 118.313,86.843 118.313,86.614 119.38,85.547 119.38,83.541 119.024,83.185 116.678,83.185 116.36,82.867 ; C2_2.1 118.501,69.9 117.729,69.128 116.957,69.128 ; R10.2 106.096,76.987 106.299,76.784 C2.2 106.299,75.514 105.461,74.676 105.461,72.918 105.837,72.542 105.837,70.891 105.811,70.866 105.248,70.866 104.867,70.485 104.867,68.523 104.902,68.488 106.35,68.488 106.375,68.513 106.375,69.85 106.705,70.18 108.28,70.18 108.356,70.104 108.356,67.575 108.537,67.395 108.537,66.901 109.22,66.218 ; 109.22,66.218 112.223,66.218 v1@112.68,66.675 ; IC2.13@115.646,69.128 116.957,69.128 ; v1@115.75,85.753 115.75,83.541 116.36,82.867
  Bottom Layer w0.152: pkb.2 95.148,89.218 95.466,88.9 99.949,88.9 100.838,88.011 ; v1(103.607,89.179) 103.988,88.798 112.293,88.798 115.392,85.7 v1(115.697,85.7) ; v1(105.639,78.918) 101.803,75.082 101.752,75.082 100.457,76.378 100.457,87.63 100.838,88.011 ; v1(109.855,85.801) 109.855,86.576 108.42,88.011 100.838,88.011 ; v1(112.68,66.599) 113.665,66.599 113.983,66.916 113.983,67.869 114.871,68.758 115.164,68.758 v1(115.367,68.555) ; v1(118.466,90.932) 119.151,90.246 119.151,89.875 119.266,89.761 119.266,89.309 119.151,89.195 119.151,89.179 119.136,89.179 118.946,88.989 118.567,88.989 118.351,88.773 118.351,87.973 v1(118.897,87.427)
pads on no net: A1.2 D1.3 D2.3 D3.3 D4.3 IC1.6 IC1.7 IC1.14 IC1.28 IC2.2 IC2.3 IC2.4 IC2.5 IC2.6 IC2.7 IC2.14 IC2.15 IC2.16 IC2.17 IC2.19 IC2.21 IC2.22 pkb.6 SW1.3 USB1.0 USB1.2 USB1.3 USB1.4
copper on no net:
  other v1: 112.624,69.621 114.275,69.621 113.436,70.383 112.598,71.196 114.249,71.196 114.86,76.104 116.36,76.104 117.86,76.104 114.86,77.604 116.36,77.604 117.86,77.604 114.86,79.104 116.36,79.104 117.86,79.104 114.957,87.603 116.532,87.603 115.693,88.391 114.957,89.178 116.506,89.178
  other v3: 107.5,35 65,77.5 150,77.5 107.5,120

## Polygon pours and split planes (outlines as drawn)
GND on Top Layer "Bottom Overlay-No Net" (solid, remove dead copper, pour order 6): 87.275,97.225 127.6,97.225 129.2,95.625 128.175,94.6 128.175,58.2 88.125,58.2 87.9,58.425
GND on Bottom Layer "Bottom Overlay-No Net" (solid, remove dead copper, pour order 8): 85.775,97.525 87.6,95.7 129.375,95.7 129.375,58.95 128.3,57.875 127.675,58.5 86.775,58.5

## Keep-outs
Keep-Out Layer:
  lines w0.152: 69.5,75.5 90,75.5 90,66.5 96.5,60 105.5,60 105.5,39.5 ; 69.5,79.5 90,79.5 90,95 105.5,95 105.5,115.5 ; 109,95 125,95 125,79.5 145.5,79.5 ; 109.5,39.5 109.5,60 125,60 125,75.5 145.5,75.5 ; 109.5,95 109.5,115.5
  lines w0.254: 69.5,75.5 cw(c64.961,77.5) 69.5,79.5 ; 105.5,39.5 ccw(c107.5,34.961) 109.5,39.5 ; 105.5,115.5 cw(c107.5,120.039) 109.5,115.5 ; 145.5,75.5 ccw(c150.039,77.5) 145.5,79.5

## Other copper
Multi-Layer:
  region: 105.5,60 105.5,39.5 109.5,39.5 109.5,60
  region: 90,79.5 69.5,79.5 69.5,75.5 90,75.5
  region: 109.5,95 109.5,115.5 105.5,115.5 105.5,95
  rectangle: 125,75.5 145.5,79.5

## Silkscreen, mask and mechanical layers (free items; w line width, h text height)
Top Overlay:
  lines w0.152: 116.075,71.475 116.4,71.8 ; 116.725,71.475 116.4,71.8 ; 118.225,69.325 118.55,69.65 ; 118.225,69.975 118.55,69.65 ; 116.4,71.8 116.4,69.65 118.55,69.65 ; 116.4,71.8 116.4,71.8 ; 118.55,69.65 118.55,69.65
  lines w0.254: 91.987,94.513 92.463,94.038 92.975,94.55
  lines w4: 107.5,42.5 107.5,57.5
  text "18/09/2013" at 108.5,98 h1.52 r90
  text "Robotronik" at 87,78 h1.52 r180
  text "Robotronik" at 128.5,77 h1.52
  text "y" at 117.175,71.275 h0.82
  text "+" at 125.025,68.875 h1.52 r90
  text "x" at 118.45,68.55 h0.82 r90
  text "ON" at 119.025,60.825 h1.52 r90
Bottom Overlay:
  lines w4: 107.5,42.5 107.5,57
  text "*" at 92.225,93.95 h0.82
  text "*" at 112.925,91.825 h0.82
  text "*" at 120.4,75.3 h0.82
  text "*" at 92.475,73.625 h0.82
  text "+" at 124.943,69.088 h1.52 r90
  text "*" at 110.875,63.7 h0.82
  text "ON" at 120.5,60.85 h1.52 r270